# EAGLE board untitled (EAGLE 7.5.0)
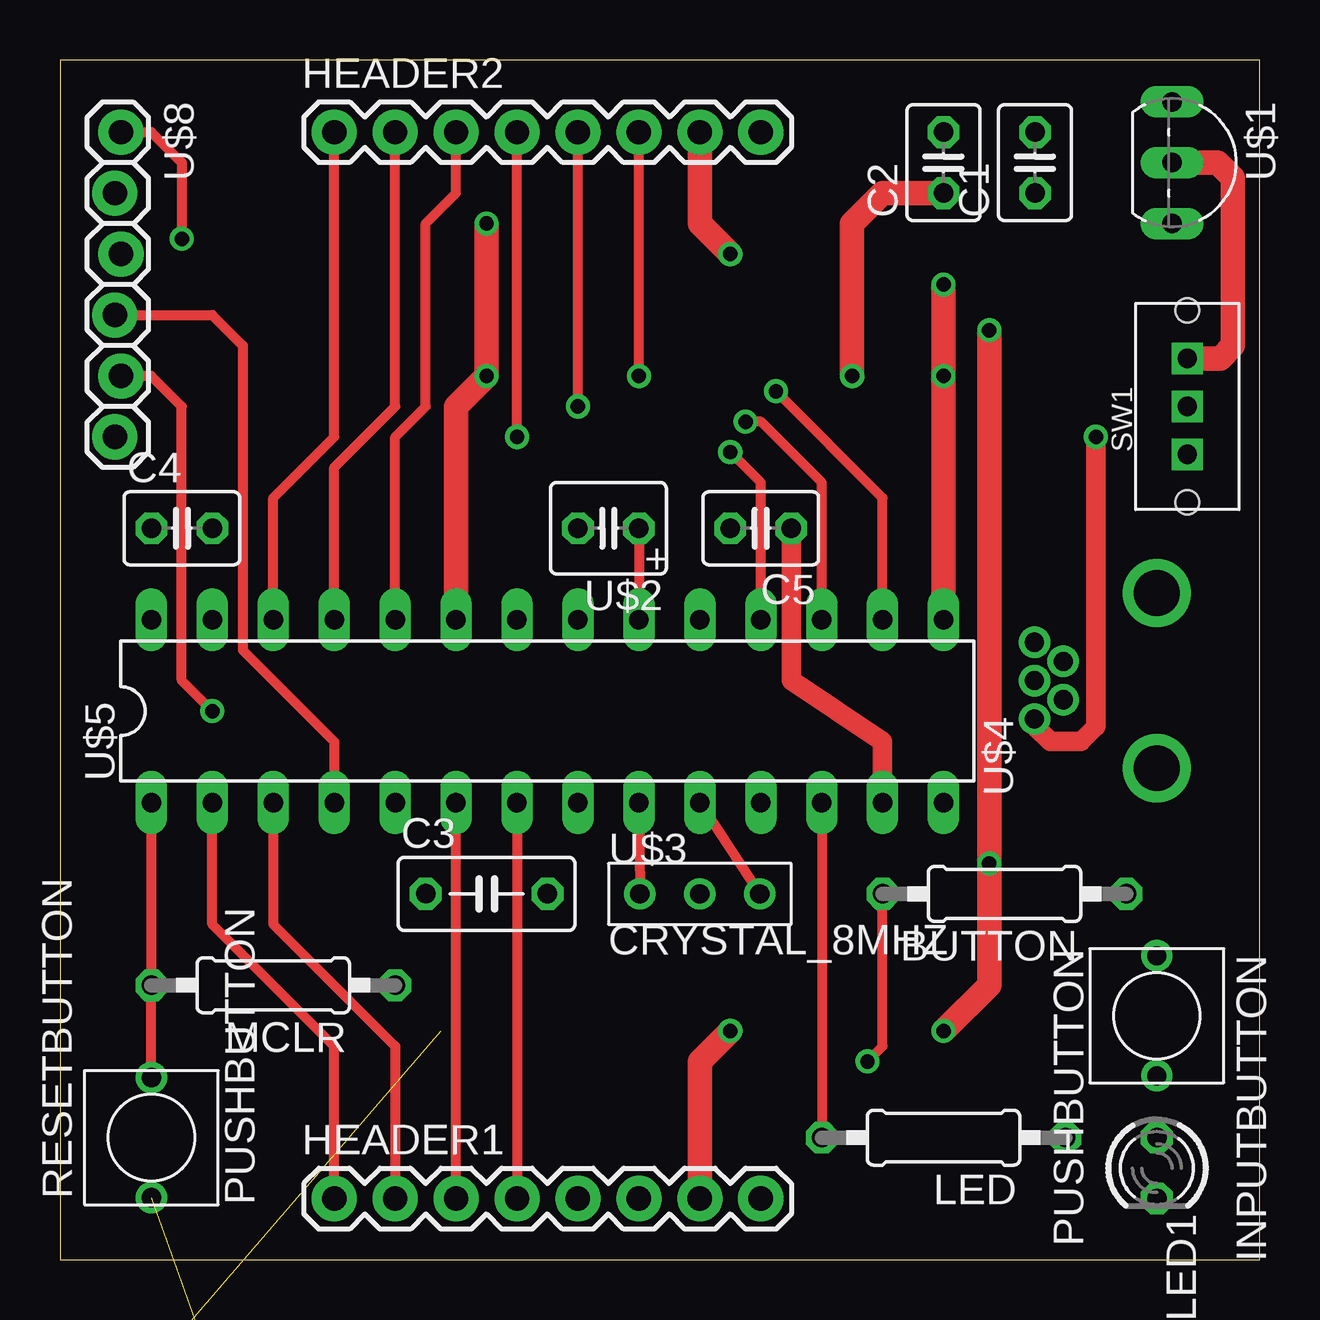
[diagram p0: board, top side]
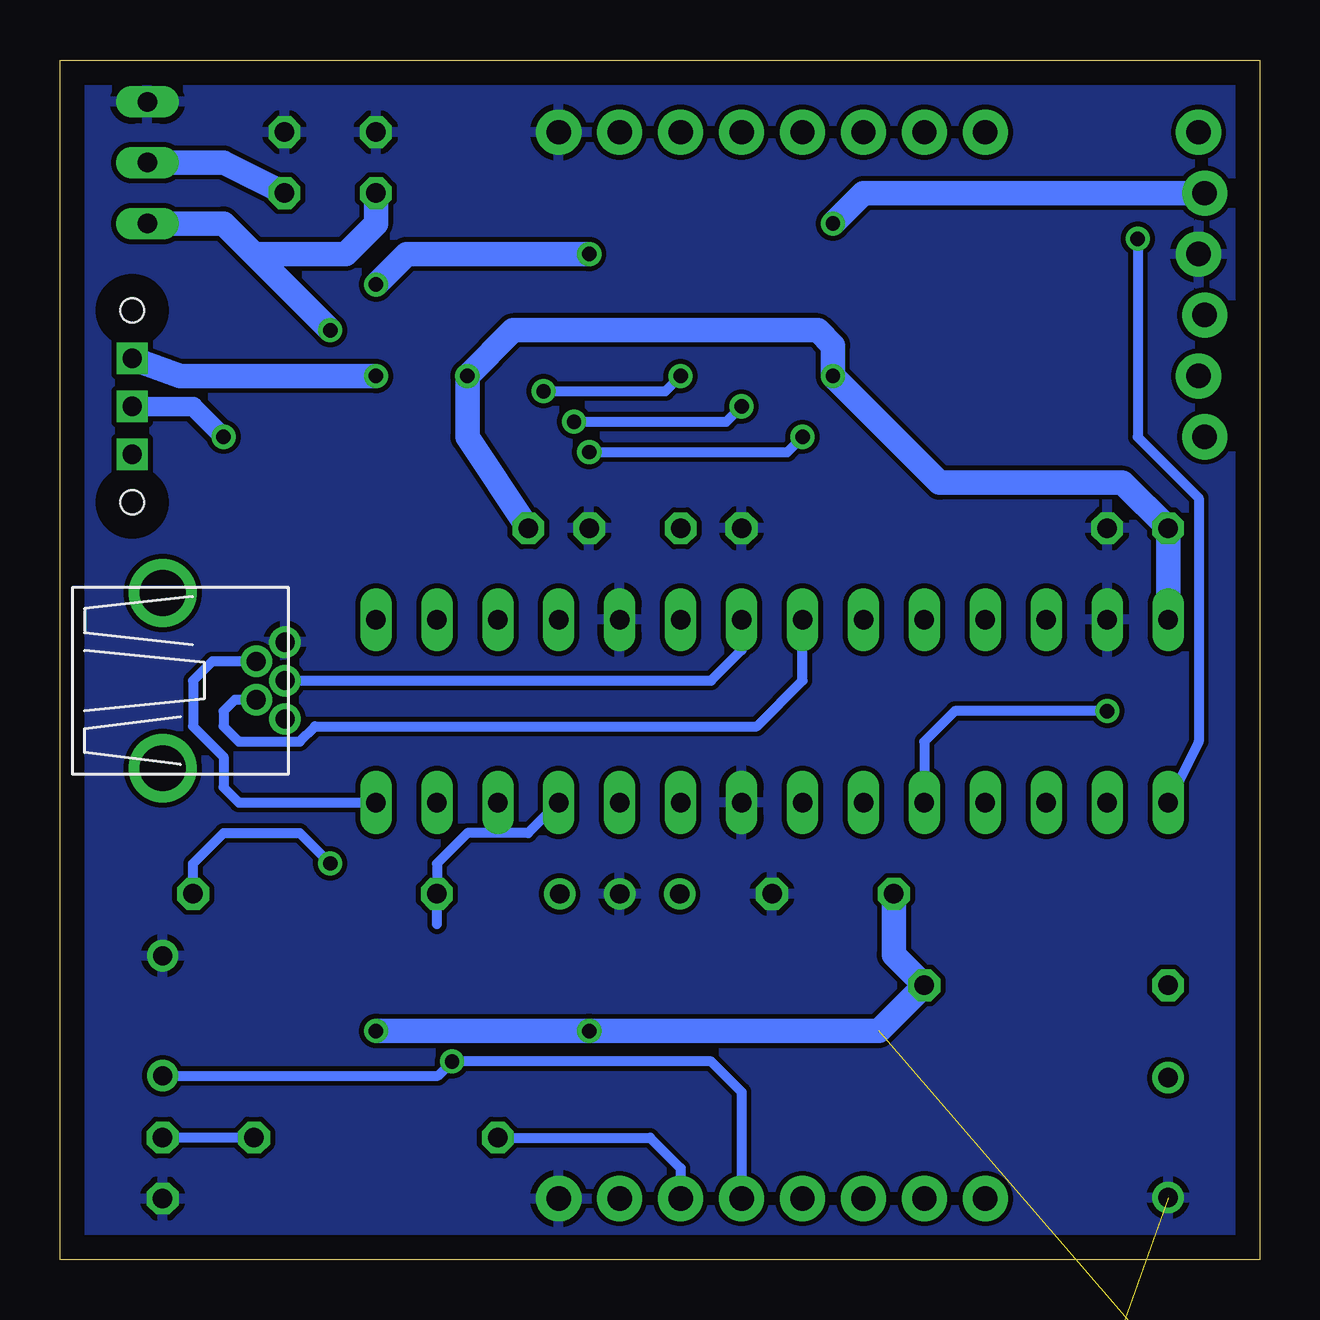
[diagram p1: board, bottom side, seen from below]

Size 50 x 50 mm. Coordinates in mm from the lower left corner, seen from the top.
Outline: 0,0 50,0 50,50 0,50 0,0
Copper layers (1*16): Top 0.035mm / dielectric 1.5mm / Bottom 0.035mm
Design rules "default": minimum track width 10mil, minimum drill 24mil, track to track 8mil, track to pad 8mil, pad to pad 8mil, via to via 8mil, smd to smd 8mil, copper to edge 40mil, drill to drill 8mil, minimum pad ring 10mil, minimum via ring 8mil, stop-mask expansion 4mil, vias tented up to drill 0mil, thermal gap 10mil

## Footprints (pad centres in the part's own frame; a part is rotated, then mirrored left to right if it is on the bottom)
0207/10 = drill 0.813 octagon: 1 -5.08,0; 2 5.08,0
C025-030X050 = drill 0.813 octagon: 1 -1.27,0; 2 1.27,0
C050-030X075 = drill 0.813 octagon: 1 -2.54,0; 2 2.54,0
1X08_ROUND = drill 1.016 pad 1.88: 1 0,0; 2 2.54,0; 3 5.08,0; 4 7.62,0; 5 10.16,0; 6 12.7,0; 7 15.24,0; 8 17.78,0
PUSHBUTTON = drill 0.8: P$1 -2.5,0; P$2 2.5,0
LED3MM = drill 0.813 octagon: A -1.27,0; K 1.27,0
SW3-2.5-11.6X4.0X5.4+2.0MM = drill 0.8 square: C 0,0; LEFT -2,0; RIGHT 2,0 | hole 1: -4,0; 4,0
TO92-EBC = drill 0.813 long: B 0,-1.27; C -2.54,-1.27; E 2.54,-1.27
C025-040X050POL = drill 0.813 octagon: + -1.27,0; - 1.27,0
CRYSTAL_8MHZ = drill 0.8: GND 0,0; OSC1 -2.5,0; OSC2 2.5,0
USB-MB-H = drill 0.8: D+ 5.1,0; D- 3.9,0.8; GND 5.1,-1.6; ID 3.9,-0.8; VBUS 5.1,1.6 | drill 1.9: P$6 0,-3.65; P$7 0,3.65
DIL28-3 = drill 0.813 long: 1 -16.51,-3.81; 2 -13.97,-3.81; 3 -11.43,-3.81; 4 -8.89,-3.81; 5 -6.35,-3.81; 6 -3.81,-3.81; 7 -1.27,-3.81; 8 1.27,-3.81; 9 3.81,-3.81; 10 6.35,-3.81; 11 8.89,-3.81; 12 11.43,-3.81; 13 13.97,-3.81; 14 16.51,-3.81; 15 16.51,3.81; 16 13.97,3.81; 17 11.43,3.81; 18 8.89,3.81; 19 6.35,3.81; 20 3.81,3.81; 21 1.27,3.81; 22 -1.27,3.81; 23 -3.81,3.81; 24 -6.35,3.81; 25 -8.89,3.81; 26 -11.43,3.81; 27 -13.97,3.81; 28 -16.51,3.81
1X06_LOCK = drill 1.016 pad 1.88: 1 0,0; 2 2.54,-0.254; 3 5.08,0; 4 7.62,-0.254; 5 10.16,0; 6 12.7,-0.254

## Placement (x,y rotation side)
BUTTON  10k  [0207/10]  39.37,15.24 180 top
C1  1uf  [C025-030X050]  40.64,45.72 90 top
C2  1uf  [C025-030X050]  36.83,45.72 90 top
C3  .1uf  [C050-030X075]  17.78,15.24 0 top
C4  .1uf  [C025-030X050]  5.08,30.48 0 top
C5  .1uf  [C025-030X050]  29.21,30.48 180 top
HEADER1  1  [1X08_ROUND]  11.43,2.54 0 top
HEADER2  2  [1X08_ROUND]  11.43,46.99 0 top
INPUTBUTTON  PUSHBUTTON  [PUSHBUTTON]  45.72,10.16 270 top
LED  330  [0207/10]  36.83,5.08 180 top
LED1  TLLG4400  [LED3MM]  45.72,3.81 270 top
MCLR  10k  [0207/10]  8.89,11.43 180 top
PWR  [LED3MM]  1.27,-8.89 0 top  (outside the outline)
RESETBUTTON  PUSHBUTTON  [PUSHBUTTON]  3.81,5.08 90 top
RPWR  330  [0207/10]  5.08,-15.24 0 top  (outside the outline)
SW1  DIP-SLIDE-SWITCH(3P-11.6X4.0X5.4+2.0MM)-EG1218  [SW3-2.5-11.6X4.0X5.4+2.0MM]  46.99,35.56 90 top
U$1  VOLTAGE_REGULATOR_MCP1702  [TO92-EBC]  47.62,45.72 270 top
U$2  CAP_TANT_10UFSHORT  [C025-040X050POL]  22.86,30.48 180 top
U$3  CRYSTAL_8MHZ  [CRYSTAL_8MHZ]  26.67,15.24 0 top
U$4  MICROUSB_BREAKOUTUSBMICROMBH  [USB-MB-H]  45.72,24.13 180 top
U$5  PIC32MX250F128B  [DIL28-3]  20.32,22.86 0 top
U$8  PICKITROW  [1X06_LOCK]  2.54,46.99 270 top

## Library data of the parts
BUTTON C1-C5 INPUTBUTTON LED MCLR PWR RESETBUTTON RPWR SW1 U$1-U$5 U$8 = components
HEADER1 HEADER2 = components; PROD_ID: CONN-08437
LED1 = components; MF: VISHAY SEMICONDUCTOR; OC_FARNELL: 1612435

## Nets
+3V3: BUTTON.1 C2.1 C3.1 C4.1 C5.1 HEADER1.7 MCLR.1 PWR.A U$1.E U$5.13 U$5.23 U$5.28 U$8.2
+5V: C1.1 HEADER2.7 SW1.RIGHT U$1.B U$5.15
A0: HEADER1.1 U$5.2
A1: HEADER1.2 U$5.3
A4: HEADER1.6 LED.2 U$5.12
B2: HEADER1.3 U$5.6
B3: HEADER1.4 U$5.7
B4: BUTTON.2 HEADER1.5 INPUTBUTTON.P$2 U$5.11
B7: HEADER2.6 U$5.16
B8: HEADER2.5 U$5.17
B9: HEADER2.4 U$5.18
B13: HEADER2.3 U$5.24
B14: HEADER2.2 U$5.25
B15: HEADER2.1 U$5.26
GND: C1.2 C2.2 C3.2 C4.2 C5.2 HEADER1.8 HEADER2.8 INPUTBUTTON.P$1 LED1.K RESETBUTTON.P$1 RPWR.2 U$1.C U$2.- U$3.GND U$4.GND U$5.8 U$5.19 U$5.27 U$8.3
MCLR: MCLR.2 RESETBUTTON.P$2 U$5.1 U$8.1
N$1: LED1.A LED.1
N$2: PWR.K RPWR.1
OSC1: U$3.OSC1 U$5.9
OSC2: U$3.OSC2 U$5.10
PICKITC: U$5.5 U$8.5
PICKITD: U$5.4 U$8.4
USBD+: U$4.D+ U$5.21
USBD-: U$4.D- U$5.22
USBID: U$4.ID U$5.14
VBUS: SW1.C U$4.VBUS
VCAP: U$2.+ U$5.20

## Tracks (layer width: path | path; a pad name or v marks a point on that pad's centre or on a via)
+3V3  (via drill 0.6)  (1 unrouted)
  Top 0.813: C5.1 30.48,24.13 34.29,21.59 U$5.13
  Top 1.016: C2.1 34.29,44.45 33.02,43.18 v33.02,36.83 | v38.73,38.73 v38.73,16.51 38.73,11.43 v36.83,9.53 | HEADER1.7 26.67,8.26 v27.94,9.53 | v17.78,43.18 v17.78,36.83 16.51,35.56 U$5.23
  Bottom 0.406: BUTTON.1 44.45,16.51 43.18,17.78 40.01,17.78 v38.73,16.51
  Bottom 1.016: C5.1 33.02,34.29 v33.02,36.83 31.11,38.73 18.41,38.73 17.78,38.1 v17.78,36.83 13.34,32.38 5.71,32.38 C4.1 U$5.28 | U$8.2 16.51,44.45 v17.78,43.18 | 41.91,41.91 v38.73,38.73 | v36.83,9.53 v27.94,9.53 15.88,9.53 MCLR.1 15.24,12.7 C3.1 | C2.1 36.83,43.18 38.1,41.91 41.91,41.91 | U$1.E 43.18,43.18 41.91,41.91
+5V  (via drill 0.6)
  Top 1.016: SW1.RIGHT 48.35,37.56 48.9,38.1 48.9,45.09 48.26,45.72 U$1.B | U$5.15 v36.83,36.83 v36.83,40.64 | HEADER2.7 26.67,43.18 v27.94,41.91
  Bottom 1.016: SW1.RIGHT 44.99,36.83 v36.83,36.83 | C1.1 43.18,45.72 U$1.B | v27.94,41.91 35.56,41.91 v36.83,40.64
A0
  Top 0.406: HEADER1.1 11.43,8.89 6.35,13.97 U$5.2
A1
  Top 0.406: U$5.3 8.89,13.97 13.97,8.89 HEADER1.2
A4
  Top 0.406: U$5.12 LED.2
  Bottom 0.406: LED.2 25.4,5.08 24.13,3.81 HEADER1.6
B2
  Top 0.406: HEADER1.3 U$5.6
B3
  Top 0.406: U$5.7 HEADER1.4
B4  (via drill 0.6)
  Top 0.406: v33.66,8.26 34.29,8.89 BUTTON.2
  Bottom 0.406: U$5.11 30.48,17.78 33.02,17.78 34.29,16.51 BUTTON.2 34.29,13.97 | HEADER1.5 21.59,6.99 22.86,8.26 v33.66,8.26 34.25,7.66 INPUTBUTTON.P$2
B7  (via drill 0.6)
  Top 0.406: U$5.16 34.29,31.75 v29.84,36.2 | v24.13,36.83 HEADER2.6
  Bottom 0.406: v29.84,36.2 24.77,36.2 v24.13,36.83
B8  (via drill 0.6)
  Top 0.406: v21.59,35.56 HEADER2.5 | U$5.17 31.75,32.38 29.21,34.92 v28.57,34.92
  Bottom 0.406: v28.57,34.92 22.23,34.92 v21.59,35.56
B9  (via drill 0.6)
  Top 0.406: U$5.18 29.21,32.38 v27.94,33.66 | v19.05,34.29 HEADER2.4
  Bottom 0.406: v27.94,33.66 19.68,33.66 v19.05,34.29
B13
  Top 0.406: U$5.24 13.97,34.29 15.24,35.56 15.24,43.18 16.51,44.45 HEADER2.3
B14
  Top 0.406: U$5.25 11.43,33.02 13.97,35.56 HEADER2.2
B15
  Top 0.406: U$5.26 8.89,31.75 11.43,34.29 HEADER2.1
GND  (1 unrouted)
  pour Bottom: 0.64,49.53 0.64,0.64 49.53,0.64 49.53,49.53
MCLR  (via drill 0.6)
  Top 0.406: U$5.1 MCLR.2 RESETBUTTON.P$2 | U$8.1 3.81,46.99 5.08,45.72 v5.08,42.55
  Bottom 0.406: U$5.1 2.54,21.59 2.54,31.75 5.08,34.29 v5.08,42.55
N$1
  Bottom 0.406: LED.1 LED1.A
N$2  (1 unrouted)
OSC1
  Top 0.406: U$5.9 U$3.OSC1
OSC2
  Top 0.406: U$5.10 U$3.OSC2
PICKITC  (via drill 0.6)
  Top 0.406: v6.35,22.86 5.08,24.13 5.08,35.56 3.81,36.83 U$8.5
  Bottom 0.406: v6.35,22.86 12.7,22.86 13.97,21.59 U$5.5
PICKITD
  Top 0.406: U$8.4 6.35,39.37 7.62,38.1 7.62,25.4 11.43,21.59 U$5.4
USBD+
  Bottom 0.406: U$4.D+ 22.86,24.13 21.59,25.4 U$5.21
USBD-
  Bottom 0.406: U$4.D- 42.71,23.33 43.18,22.86 43.18,22.23 42.55,21.59 40.01,21.59 39.37,22.23 20.95,22.23 19.05,24.13 U$5.22
USBID
  Bottom 0.406: U$4.ID 43.65,24.93 44.45,24.13 44.45,22.23 43.18,20.95 43.18,19.68 42.55,19.05 U$5.14
VBUS  (via drill 0.6)
  Top 0.813: U$4.VBUS 40.62,22.25 41.27,21.59 42.55,21.59 43.18,22.23 v43.18,34.29
  Bottom 0.813: v43.18,34.29 44.45,35.56 SW1.C
VCAP
  Top 0.406: U$2.+ U$5.20